# EAGLE board remote_v0.14-Beta.c2a04ac5 (EAGLE 7.7.0), part 1 of 2
BOARDNAME: BERTL-06-1; REVISION: R1.0; VERSION: V1.0
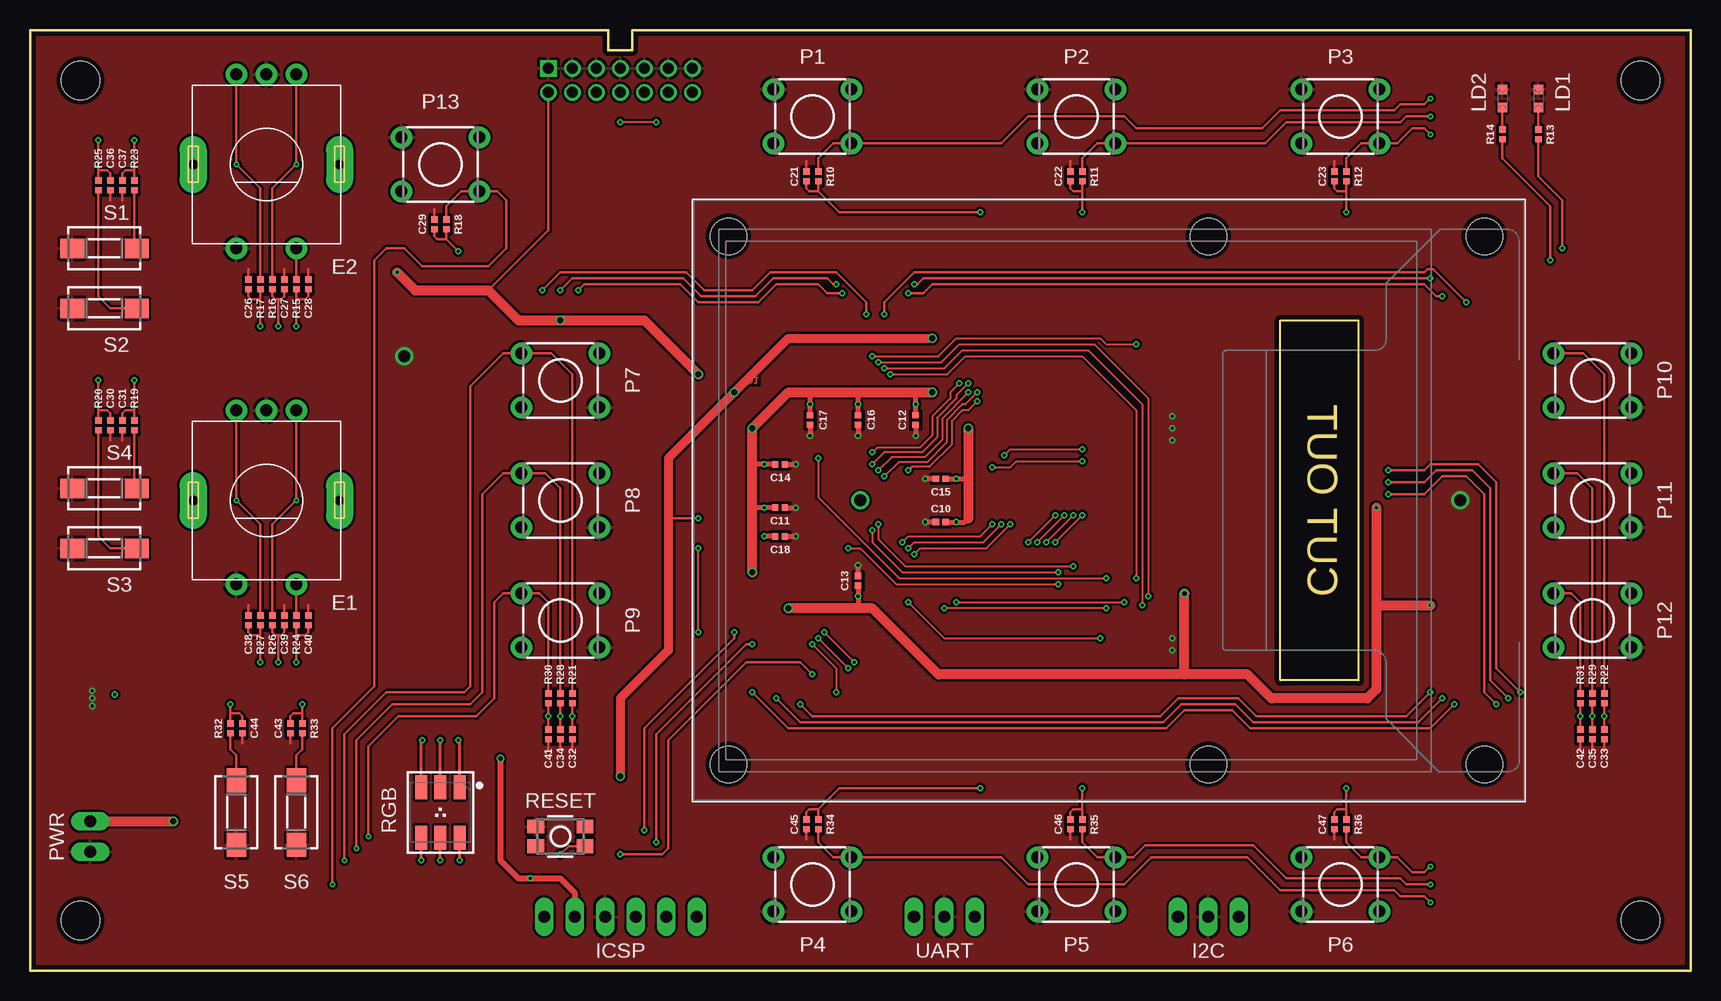
[diagram p0: board, top side]
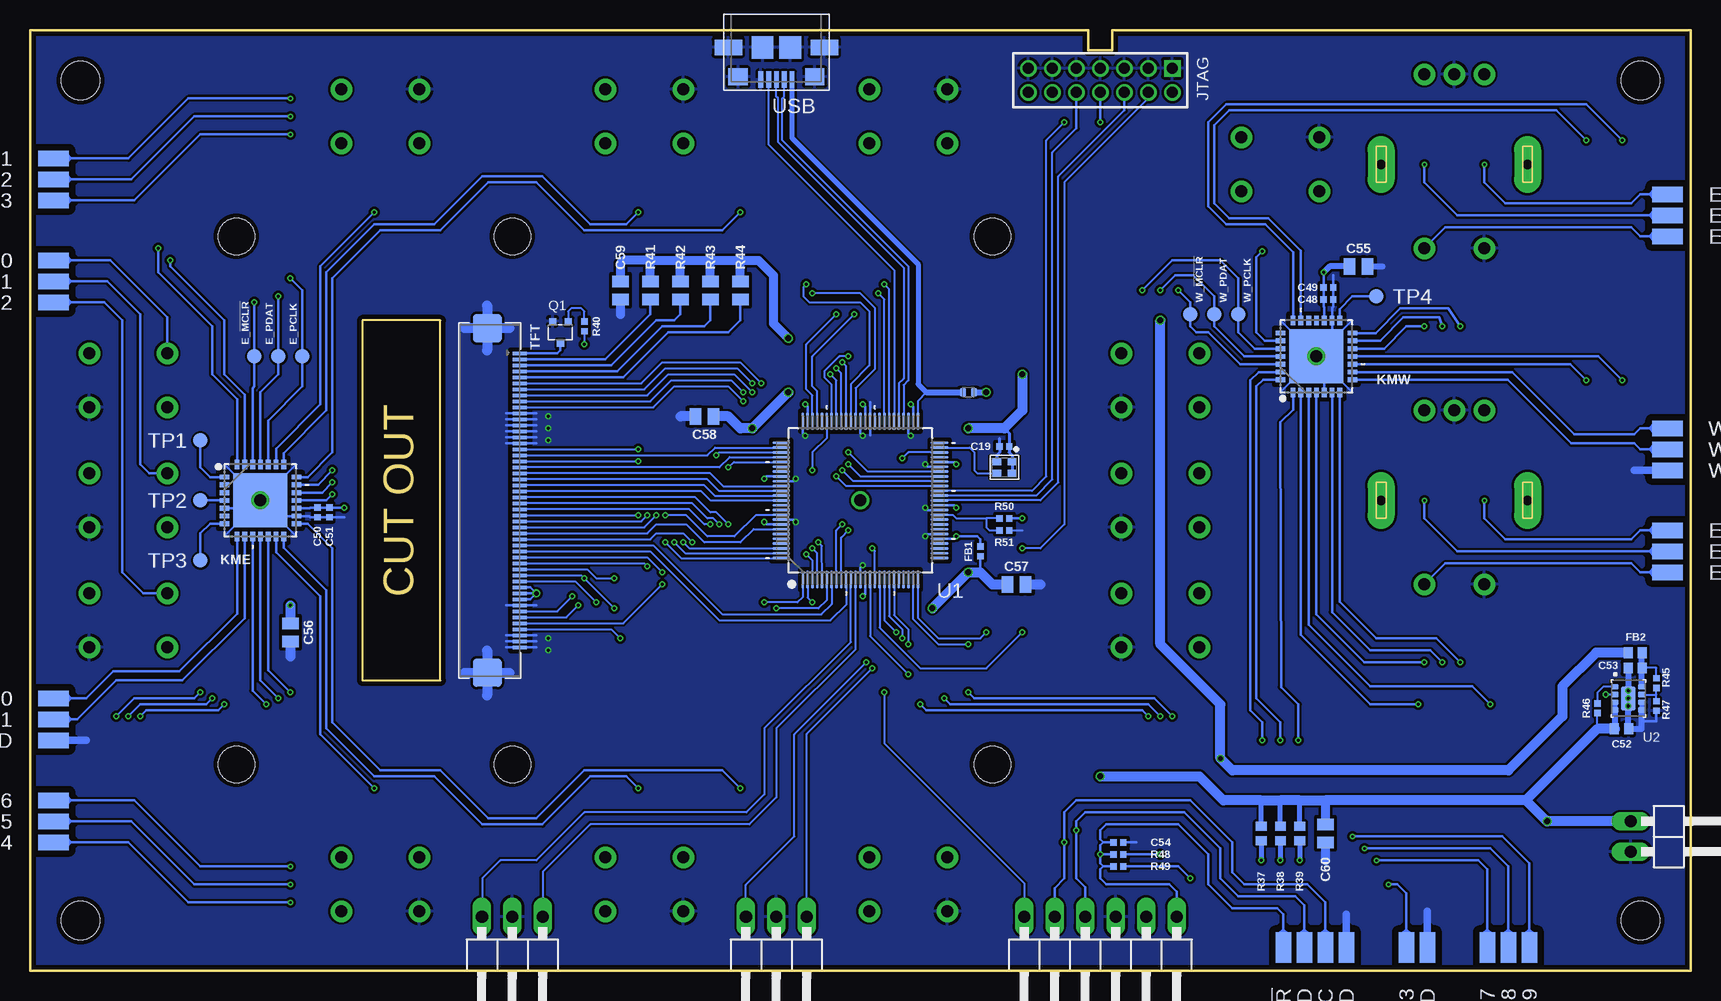
[diagram p1: board, bottom side, seen from below]

Size 138.4 x 78.4 mm. Coordinates in mm from the lower left corner, seen from the top.
Outline: 0,78.4 48.2,78.4 48.2,76.7 50.2,76.7 50.2,78.4 138.4,78.4 138.4,0 0,0 0,78.4
Outline: 104.2,54.2 110.7,54.2 110.7,24.2 104.2,24.2 104.2,54.2
Copper layers (1*16): Top 0.0356mm / dielectric 1.5011mm / Bottom 0.0356mm
Design rules "OSHPark-2layer-new *": minimum track width 6mil, minimum drill 10mil, track to track 6mil, track to pad 6mil, pad to pad 6mil, via to via 6mil, smd to smd 6mil, copper to edge 15mil, drill to drill 6mil, minimum pad ring 5mil, minimum via ring 5mil, stop-mask expansion 2mil, vias tented up to drill 50mil, thermal gap 10mil
Net classes: 0 default: width 0.152 mm, drill 0.254 mm, clearance 0.152 mm
Holes 3.2 mm at 4.2,74.2 4.2,4.2 134.2,4.2 134.2,74.2
Holes 3 mm at 121.2,61.2 58.2,61.2 58.2,17.2 121.2,17.2 98.2,61.2 98.2,17.2
tKeepout: area 55.7,58.7 to 60.7,63.7; area 95.7,58.7 to 100.7,63.7; area 118.7,58.7 to 123.7,63.7; area 118.7,14.7 to 123.7,19.7; area 95.7,14.7 to 100.7,19.7; area 55.7,14.7 to 60.7,19.7; area 130.2,0.2 to 138.2,8.2; area 130.2,70.2 to 138.2,78.2; area 0.2,70.2 to 8.2,78.2; area 0.2,0.2 to 8.2,8.2
bKeepout: area 54.2,57.2 to 62.2,65.2; area 94.2,57.2 to 102.2,65.2; area 117.2,57.2 to 125.2,65.2; area 117.2,13.2 to 125.2,21.2; area 94.2,13.2 to 102.2,21.2; area 54.2,13.2 to 62.2,21.2; area 0.2,70.2 to 8.2,78.2; area 0.2,0.2 to 8.2,8.2; area 130.2,0.2 to 138.2,8.2; area 130.2,70.2 to 138.2,78.2

## Footprints (pad centres in the part's own frame; a part is rotated, then mirrored left to right if it is on the bottom)
50X100-MIL = smd 1.27 x 2.54: 1 0,0
0402-C = smd 0.52 x 0.52: 1 -0.4,0; 2 0.4,0
0603-C = smd 0.75 x 0.9: 1 -0.6,0; 2 0.6,0
0805-C = smd 0.95 x 1.35: 1 -0.75,0; 2 0.75,0
DFN1006D-2 = smd 0.5 x 0.7: A 0.45,0; C -0.45,0
EC11_SW-LP = drill 1 pad 1.778: A -2.5,-7.5; B 2.5,-7.5; C 0,-7.5; D -2.5,7; E 2.5,7 | drill 0.8 pad 2.25 long: GND1 -6.1,0; GND2 6.1,0
TP12R = smd 1.2 x 1.2: TP 0,0
1X03/90 = drill 1.016 long: 1 -2.54,-3.81; 2 0,-3.81; 3 2.54,-3.81
1X06/90 = drill 1.016 long: 1 -6.35,-3.81; 2 -3.81,-3.81; 3 -1.27,-3.81; 4 1.27,-3.81; 5 3.81,-3.81; 6 6.35,-3.81
2X07M = drill 0.914 square: 1 -6,-1 | drill 0.914: 2 -6,1; 3 -4,-1; 4 -4,1; 5 -2,-1; 6 -2,1; 7 0,-1; 8 0,1; 9 2,-1; 10 2,1; 11 4,-1; 12 4,1; 13 6,-1; 14 6,1
QFN65P600X600X100-29N = smd 0.8 x 0.4: 1 -3,1.95; 2 -3,1.3; 3 -3,0.65; 4 -3,0; 5 -3,-0.65; 6 -3,-1.3; 7 -3,-1.95; 15 3,-1.95; 16 3,-1.3; 17 3,-0.65; 18 3,0; 19 3,0.65; 20 3,1.3; 21 3,1.95 | smd 0.4 x 0.8: 8 -1.95,-3; 9 -1.3,-3; 10 -0.65,-3; 11 0,-3; 12 0.65,-3; 13 1.3,-3; 14 1.95,-3; 22 1.95,3; 23 1.3,3; 24 0.65,3; 25 0,3; 26 -0.65,3; 27 -1.3,3; 28 -1.95,3 | smd 4.5 x 4.5: EP 0,0
CHIPLED_0603 = smd 0.8 x 0.8: A 0,-0.75; C 0,0.75
6X6-THT = drill 1 pad 1.778: 1 -3.25,2.25; 2 3.25,2.25; 3 -3.25,-2.25; 4 3.25,-2.25
1X02/90 = drill 1.016 long: 1 -2.54,-3.81; 2 0,-3.81
SOT323 = smd 0.6 x 0.55: 1 -0.65,-0.925; 2 0.65,-0.925; 3 0,0.925
3X4MM = smd 1.4 x 1.15: 1 -2.05,0.825; 2 2.05,0.825; 3 -2.05,-0.825; 4 2.05,-0.825
RGBLED_PLCC6 = smd 1 x 2: 1 -1.6,-2.108; 2 0,-2.108; 3 1.6,-2.108; 4 1.6,2.108; 5 0,2.108; 6 -1.6,2.108
DTSM-3 = smd 2 x 1.6: 1 -2.7,0; 2 2.7,0
TFT_2.83IN_240X320_50PIN = smd 0.275 x 1.2 bottom: 1 12.25,-10.39; 2 11.75,-10.39; 3 11.25,-10.39; 4 10.75,-10.39; 5 10.25,-10.39; 6 9.75,-10.39; 7 9.25,-10.39; 8 8.75,-10.39; 9 8.25,-10.39; 10 7.75,-10.39; 11 7.25,-10.39; 12 6.75,-10.39; 13 6.25,-10.39; 14 5.75,-10.39; 15 5.25,-10.39; 16 4.75,-10.39; 17 4.25,-10.39; 18 3.75,-10.39; 19 3.25,-10.39; 20 2.75,-10.39; 21 2.25,-10.39; 22 1.75,-10.39; 23 1.25,-10.39; 24 0.75,-10.39; 25 0.25,-10.39; 26 -0.25,-10.39; 27 -0.75,-10.39; 28 -1.25,-10.39; 29 -1.75,-10.39; 30 -2.25,-10.39; 31 -2.75,-10.39; 32 -3.25,-10.39; 33 -3.75,-10.39; 34 -4.25,-10.39; 35 -4.75,-10.39; 36 -5.25,-10.39; 37 -5.75,-10.39; 38 -6.25,-10.39; 39 -6.75,-10.39; 40 -7.25,-10.39; 41 -7.75,-10.39; 42 -8.25,-10.39; 43 -8.75,-10.39; 44 -9.25,-10.39; 45 -9.75,-10.39; 46 -10.25,-10.39; 47 -10.75,-10.39; 48 -11.25,-10.39; 49 -11.75,-10.39; 50 -12.25,-10.39 | smd 2.4 x 2.4 bottom: PAD1 14.35,-13.09; PAD2 -14.35,-13.09
QFP40P1200X1200X120-100N = smd 1.473 x 0.229: 1 -6.6,4.8; 2 -6.6,4.4; 3 -6.6,4; 4 -6.6,3.6; 5 -6.6,3.2; 6 -6.6,2.8; 7 -6.6,2.4; 8 -6.6,2; 9 -6.6,1.6; 10 -6.6,1.2; 11 -6.6,0.8; 12 -6.6,0.4; 13 -6.6,0; 14 -6.6,-0.4; 15 -6.6,-0.8; 16 -6.6,-1.2; 17 -6.6,-1.6; 18 -6.6,-2; 19 -6.6,-2.4; 20 -6.6,-2.8; 21 -6.6,-3.2; 22 -6.6,-3.6; 23 -6.6,-4; 24 -6.6,-4.4; 25 -6.6,-4.8; 51 6.6,-4.8; 52 6.6,-4.4; 53 6.6,-4; 54 6.6,-3.6; 55 6.6,-3.2; 56 6.6,-2.8; 57 6.6,-2.4; 58 6.6,-2; 59 6.6,-1.6; 60 6.6,-1.2; 61 6.6,-0.8; 62 6.6,-0.4; 63 6.6,0; 64 6.6,0.4; 65 6.6,0.8; 66 6.6,1.2; 67 6.6,1.6; 68 6.6,2; 69 6.6,2.4; 70 6.6,2.8; 71 6.6,3.2; 72 6.6,3.6; 73 6.6,4; 74 6.6,4.4; 75 6.6,4.8 | smd 0.229 x 1.473: 26 -4.8,-6.6; 27 -4.4,-6.6; 28 -4,-6.6; 29 -3.6,-6.6; 30 -3.2,-6.6; 31 -2.8,-6.6; 32 -2.4,-6.6; 33 -2,-6.6; 34 -1.6,-6.6; 35 -1.2,-6.6; 36 -0.8,-6.6; 37 -0.4,-6.6; 38 0,-6.6; 39 0.4,-6.6; 40 0.8,-6.6; 41 1.2,-6.6; 42 1.6,-6.6; 43 2,-6.6; 44 2.4,-6.6; 45 2.8,-6.6; 46 3.2,-6.6; 47 3.6,-6.6; 48 4,-6.6; 49 4.4,-6.6; 50 4.8,-6.6; 76 4.8,6.6; 77 4.4,6.6; 78 4,6.6; 79 3.6,6.6; 80 3.2,6.6; 81 2.8,6.6; 82 2.4,6.6; 83 2,6.6; 84 1.6,6.6; 85 1.2,6.6; 86 0.8,6.6; 87 0.4,6.6; 88 0,6.6; 89 -0.4,6.6; 90 -0.8,6.6; 91 -1.2,6.6; 92 -1.6,6.6; 93 -2,6.6; 94 -2.4,6.6; 95 -2.8,6.6; 96 -3.2,6.6; 97 -3.6,6.6; 98 -4,6.6; 99 -4.4,6.6; 100 -4.8,6.6
MICROSIP = smd 0.48 x 0.58: 1 -0.975,-1.1; 2 -0.325,-1.1; 3 0.325,-1.1; 4 0.975,-1.1; 5 0.975,1.1; 6 0.325,1.1; 7 -0.325,1.1; 8 -0.975,1.1 | smd 2 x 1.2: EP 0,0
2.0X1.6 = smd 0.75 x 0.65: 1 -0.65,-0.5; 2 0.65,-0.5; 3 0.65,0.5; 4 -0.65,0.5
MICRO-AB-H-SMT = smd 0.4 x 1.35: 1 -1.3,4.125; 2 -0.65,4.125; 3 0,4.125; 4 0.65,4.125; 5 1.3,4.125 | smd 2.3 x 1.3: Z1 -4,1.45; Z4 4,1.45 | smd 1.8 x 1.9: Z2 -1.15,1.45; Z3 1.15,1.45 | smd 1.6 x 1.4: Z5 -3.2,3.9; Z6 3.2,3.9

## Placement (x,y rotation side)
!MCLR  [50X100-MIL]  33.95,1.95 180 bottom
B_GND  [50X100-MIL]  21.95,1.95 180 bottom
B_P1  [50X100-MIL]  136.45,67.7 90 bottom
B_P2  [50X100-MIL]  136.45,65.95 90 bottom
B_P3  [50X100-MIL]  136.45,64.2 90 bottom
B_P4  [50X100-MIL]  136.45,10.7 90 bottom
B_P5  [50X100-MIL]  136.45,12.45 90 bottom
B_P6  [50X100-MIL]  136.45,14.2 90 bottom
B_P7  [50X100-MIL]  16.95,1.95 180 bottom
B_P8  [50X100-MIL]  15.2,1.95 180 bottom
B_P9  [50X100-MIL]  13.45,1.95 180 bottom
B_P10  [50X100-MIL]  136.45,59.2 90 bottom
B_P11  [50X100-MIL]  136.45,57.45 90 bottom
B_P12  [50X100-MIL]  136.45,55.7 90 bottom
B_P13  [50X100-MIL]  23.7,1.95 180 bottom
C10  100n  [0402-C]  75.9,37.4 180 top
C11  100n  [0402-C]  62.5,38.6 0 top
C12  100n  [0402-C]  73.8,45.9 270 top
C13  100n  [0402-C]  69,32.5 90 top
C14  100n  [0402-C]  62.5,42.2 0 top
C15  100n  [0402-C]  75.9,41 180 top
C16  100n  [0402-C]  69,45.9 270 top
C17  100n  [0402-C]  65,45.9 270 top
C18  100n  [0402-C]  62.5,36.2 0 top
C19  1u  [0402-C]  57.2,43.7 180 bottom
C21  [0402-C]  64.7,66.2 90 top
C22  [0402-C]  86.7,66.2 90 top
C23  [0402-C]  108.7,66.2 90 top
C26  [0402-C]  18.2,57.2 90 top
C27  [0402-C]  21.2,57.2 90 top
C28  [0402-C]  23.2,57.2 90 top
C29  [0402-C]  33.7,62.2 90 top
C30  [0402-C]  6.7,45.45 270 top
C31  [0402-C]  7.7,45.45 270 top
C32  [0402-C]  45.2,19.7 90 top
C33  [0402-C]  131.2,19.7 90 top
C34  [0402-C]  44.2,19.7 90 top
C35  [0402-C]  130.2,19.7 90 top
C36  [0402-C]  6.7,65.45 270 top
C37  [0402-C]  7.7,65.45 270 top
C38  [0402-C]  18.2,29.2 90 top
C39  [0402-C]  21.2,29.2 90 top
C40  [0402-C]  23.2,29.2 90 top
C41  [0402-C]  43.2,19.7 90 top
C42  [0402-C]  129.2,19.7 90 top
C43  [0402-C]  21.7,20.2 270 top
C44  [0402-C]  17.7,20.2 270 top
C45  [0402-C]  64.7,12.2 90 top
C46  [0402-C]  86.7,12.2 90 top
C47  [0402-C]  108.7,12.2 90 top
C48  100n  [0402-C]  30.2,55.95 0 bottom
C49  1u  [0402-C]  30.2,56.95 0 bottom
C50  100n  [0402-C]  114.45,38.2 270 bottom
C51  1u  [0402-C]  113.45,38.2 270 bottom
C52  10u  [0603-C]  5.77,20.16 0 bottom
C53  10u  [0603-C]  4.63,25.24 180 bottom
C54  100n  [0402-C]  47.7,10.7 0 bottom
C55  22u  [0805-C]  27.7,58.7 0 bottom
C56  22u  [0805-C]  116.7,28.2 270 bottom
C57  22u  [0805-C]  56.2,32.2 0 bottom
C58  22u  [0805-C]  82.2,46.2 180 bottom
C59  22u  [0805-C]  89.2,56.7 270 bottom
C60  22u  [0805-C]  30.45,11.45 270 bottom
C_GND  [50X100-MIL]  28.7,1.95 180 bottom
D1  PMEG2010BELD  [DFN1006D-2]  60.2,48.2 180 bottom
E1  EC11_SW-LP  [EC11_SW-LP]  19.7,39.2 180 top
E1_A  [50X100-MIL]  1.95,34.95 270 bottom
E1_B  [50X100-MIL]  1.95,36.7 270 bottom
E1_S  [50X100-MIL]  1.95,33.2 270 bottom
E2  EC11_SW-LP  [EC11_SW-LP]  19.7,67.2 180 top
E2_A  [50X100-MIL]  1.95,62.95 270 bottom
E2_B  [50X100-MIL]  1.95,64.7 270 bottom
E2_S  [50X100-MIL]  1.95,61.2 270 bottom
E_!MCLR  TPTP12R  [TP12R]  119.7,51.2 270 bottom
E_GND  [50X100-MIL]  136.45,19.2 90 bottom
E_PCLK  TPTP12R  [TP12R]  115.7,51.2 270 bottom
E_PDAT  TPTP12R  [TP12R]  117.7,51.2 270 bottom
E_RC0  [50X100-MIL]  136.45,22.7 90 bottom
E_RC1  [50X100-MIL]  136.45,20.95 90 bottom
FB1  600R  [0402-C]  59.2,34.95 90 bottom
FB2  33R  [0603-C]  4.63,26.51 180 bottom
I2C  [1X03/90]  98.2,0.7 180 bottom
ICSP  [1X06/90]  49.2,0.7 180 bottom
JTAG  [2X07M]  49.2,74.2 180 bottom
KME  PIC16F1718-I/ML  [QFN65P600X600X100-29N]  119.2,39.2 0 bottom
KMW  PIC16F1718-I/ML  [QFN65P600X600X100-29N]  31.2,51.2 90 bottom
LD1  LED  [CHIPLED_0603]  125.7,72.7 0 top
LD2  LED  [CHIPLED_0603]  122.7,72.7 0 top
P1  DTSM-6THT  [6X6-THT]  65.2,71.2 0 top
P2  DTSM-6THT  [6X6-THT]  87.2,71.2 0 top
P3  DTSM-6THT  [6X6-THT]  109.2,71.2 0 top
P4  DTSM-6THT  [6X6-THT]  65.2,7.2 0 top
P5  DTSM-6THT  [6X6-THT]  87.2,7.2 0 top
P6  DTSM-6THT  [6X6-THT]  109.2,7.2 0 top
P7  DTSM-6THT  [6X6-THT]  44.2,49.2 0 top
P8  DTSM-6THT  [6X6-THT]  44.2,39.2 0 top
P9  DTSM-6THT  [6X6-THT]  44.2,29.2 0 top
P10  DTSM-6THT  [6X6-THT]  130.2,49.2 0 top
P11  DTSM-6THT  [6X6-THT]  130.2,39.2 0 top
P12  DTSM-6THT  [6X6-THT]  130.2,29.2 0 top
P13  DTSM-6THT  [6X6-THT]  34.2,67.2 0 top
PGEC  [50X100-MIL]  30.45,1.95 180 bottom
PGED  [50X100-MIL]  32.2,1.95 180 bottom
PWR  [1X02/90]  1.2,9.91 270 bottom
Q1  MMBT2222  [SOT323]  94.2,53.2 180 bottom
R10  [0402-C]  65.7,66.2 90 top
R11  [0402-C]  87.7,66.2 90 top
R12  [0402-C]  109.7,66.2 90 top
R13  [0402-C]  125.7,69.7 90 top
R14  [0402-C]  122.7,69.7 90 top
R15  [0402-C]  22.2,57.2 270 top
R16  [0402-C]  20.2,57.2 90 top
R17  [0402-C]  19.2,57.2 90 top
R18  [0402-C]  34.7,62.2 270 top
R19  [0402-C]  8.7,45.45 270 top
R20  [0402-C]  5.7,45.45 270 top
R21  [0402-C]  45.2,22.7 90 top
R22  [0402-C]  131.2,22.7 90 top
R23  [0402-C]  8.7,65.45 270 top
R24  [0402-C]  22.2,29.2 270 top
R25  [0402-C]  5.7,65.45 270 top
R26  [0402-C]  20.2,29.2 90 top
R27  [0402-C]  19.2,29.2 90 top
R28  [0402-C]  44.2,22.7 90 top
R29  [0402-C]  130.2,22.7 90 top
R30  [0402-C]  43.2,22.7 90 top
R31  [0402-C]  129.2,22.7 90 top
R32  [0402-C]  16.7,20.2 270 top
R33  [0402-C]  22.7,20.2 270 top
R34  [0402-C]  65.7,12.2 90 top
R35  [0402-C]  87.7,12.2 90 top
R36  [0402-C]  109.7,12.2 90 top
R37  [0603-C]  35.8,11.45 270 bottom
R38  [0603-C]  34.2,11.45 270 bottom
R39  [0603-C]  32.6,11.45 270 bottom
R40  2k  [0402-C]  92.2,53.7 270 bottom
R41  68R  [0805-C]  86.7,56.7 270 bottom
R42  68R  [0805-C]  84.2,56.7 270 bottom
R43  68R  [0805-C]  81.7,56.7 270 bottom
R44  68R  [0805-C]  79.2,56.7 270 bottom
R45  510k  [0402-C]  2.86,23.98 90 bottom
R46  10k  [0402-C]  7.78,21.88 270 bottom
R47  162k  [0402-C]  2.86,22.07 90 bottom
R48  1k  [0402-C]  47.7,9.7 180 bottom
R49  10k  [0402-C]  47.7,8.7 0 bottom
R50  10k  [0402-C]  57.2,37.7 0 bottom
R51  10k  [0402-C]  57.2,36.7 180 bottom
RESET  DTSM-6  [3X4MM]  44.2,11.2 0 top
RGB  [RGBLED_PLCC6]  34.2,13.2 180 top
S1  DTSM-3  [DTSM-3]  6.2,60.2 0 top
S2  DTSM-3  [DTSM-3]  6.2,55.2 0 top
S3  DTSM-3  [DTSM-3]  6.2,40.2 0 top
S4  DTSM-3  [DTSM-3]  6.2,35.2 0 top
S5  DTSM-3  [DTSM-3]  17.2,13.2 90 top
S6  DTSM-3  [DTSM-3]  22.2,13.2 90 top
TFT  [TFT_2.83IN_240X320_50PIN]  87.2,39.2 90 top
TP1  TPTP12R  [TP12R]  124.2,44.2 0 bottom
TP2  TPTP12R  [TP12R]  124.2,39.2 0 bottom
TP3  TPTP12R  [TP12R]  124.2,34.2 0 bottom
TP4  TPTP12R  [TP12R]  26.2,56.2 0 bottom
U1  PIC32MZ-100  [QFP40P1200X1200X120-100N]  69.2,39.2 90 bottom
U2  TPS82085  [MICROSIP]  5.2,22.7 270 bottom
U3  SMD-OSC-2.0X1.6  [2.0X1.6]  57.2,41.95 180 bottom
UART  [1X03/90]  76.2,0.7 180 bottom
USB  5_USB_3S  [MICRO-AB-H-SMT]  76.2,78.4 180 bottom
W_!MCLR  TPTP12R  [TP12R]  41.7,54.7 270 bottom
W_GND  [50X100-MIL]  1.95,41.7 270 bottom
W_PCLK  TPTP12R  [TP12R]  37.7,54.7 270 bottom
W_PDAT  TPTP12R  [TP12R]  39.7,54.7 270 bottom
W_RC0  [50X100-MIL]  1.95,43.45 270 bottom
W_RC1  [50X100-MIL]  1.95,45.2 270 bottom

## Library data of the parts
!MCLR B_GND B_P1-B_P13 C_GND E1_A E1_B E1_S E2_A E2_B E2_S E_GND E_RC0 E_RC1 PGEC PGED W_GND W_RC0 W_RC1 = smd_pads
C10-C19 C21-C23 C26-C60 FB1 FB2 R10-R51 = generic-rcl
D1 = pmeg2010beld
E1 E2 = encoder
E_!MCLR E_PCLK E_PDAT TP1-TP4 W_!MCLR W_PCLK W_PDAT = testpad
I2C JTAG PWR UART = pinhead-2
ICSP = pinhead
KME KMW = pic16f1718
LD1 LD2 = led
P1-P13 RESET S1-S6 = switch
Q1 = transistor
RGB = rgb_led
TFT = tft
U1 = pic32mz
U2 = TPS82085
U3 = xtal
USB = usb

## Nets
3V3: C10.1 C11.1 C12.1 C13.1 C14.1 C15.1 C16.1 C17.1 C19.1 C48.1 C49.1 C50.1 C51.1 C55.1 C56.1 C57.1 C58.1 FB1.1 FB2.2 ICSP.2 JTAG.2 KME.17 KMW.17 R49.2 TFT.40 TFT.41 TFT.42 U1.14 U1.37 U1.46 U1.52 U1.62 U1.74 U1.83 U1.93 U3.1 U3.4
5V0: C52.1 C59.1 C60.1 D1.C PWR.1 R37.1 R38.1 R39.1 R41.1 R42.1 R43.1 R44.1 R46.2 R50.2 U2.3 U2.4
!MCLR: !MCLR.1 C54.1 ICSP.1 R48.2 R49.1 U1.15
!SS6: TFT.38 U1.6 U1.68
AN6: R50.1 R51.2 U1.35
AVDD: C18.1 FB1.2 U1.30
B: KMW.27 RGB.1
B14_L12_P: U2.2
D+: U1.55 USB.3
D-: U1.54 USB.2
E1_A: C39.1 KMW.6 R26.1
E1_B: C38.1 KMW.7 R27.1
E1_S: C40.1 KMW.4 R24.2
E2_A: C27.1 KMW.13 R16.1
E2_B: C26.1 KMW.14 R17.1
E2_S: C28.1 KMW.12 R15.2
EN_B: R46.1 U2.1
FB_B: R45.1 R47.2 U2.7
G: KMW.28 RGB.2
GND: B_GND.1 C10.2 C11.2 C12.2 C13.2 C14.2 C15.2 C16.2 C17.2 C18.2 C19.2 C21.2 C22.2 C23.2 C26.2 C27.2 C28.2 C29.2 C30.2 C31.2 C32.1 C33.1 C34.1 C35.1 C36.2 C37.2 C38.2 C39.2 C40.2 C41.1 C42.1 C43.2 C44.2 C45.1 C46.1 C47.1 C48.2 C49.2 C50.2 C51.2 C52.2 C53.2 C54.2 C55.2 C56.2 C57.2 C58.2 C59.2 C60.2 C_GND.1 E1.C E1.E E2.C E2.E E_GND.1 I2C.2 ICSP.3 JTAG.1 JTAG.3 JTAG.5 JTAG.7 JTAG.9 JTAG.11 JTAG.13 KME.5 KME.16 KME.EP KMW.5 KMW.16 KMW.EP LD1.C LD2.C P1.1 P2.1 P3.1 P4.3 P5.3 P6.3 P7.4 P8.4 P9.4 P10.4 P11.4 P12.4 P13.1 PWR.2 Q1.2 R47.1 R51.1 RESET.1 S1.1 S2.1 S3.1 S4.1 S5.1 S6.1 TFT.11 TFT.12 TFT.13 TFT.14 TFT.15 TFT.16 TFT.43 TFT.48 TFT.49 TFT.50 U1.13 U1.31 U1.36 U1.45 U1.53 U1.61 U1.63 U1.75 U1.84 U1.92 U2.5 U2.6 U2.EP U3.2 UART.2 USB.5 USB.Z1 USB.Z2 USB.Z3 USB.Z4 USB.Z5 USB.Z6 W_GND.1
KME_!MCLR: E_!MCLR.TP KME.26 U1.73
KME_PCLK: E_PCLK.TP KME.24 U1.65
KME_PDAT: E_PDAT.TP KME.25 U1.64
KMW_!MCLR: KMW.26 U1.72 W_!MCLR.TP
KMW_PCLK: KMW.24 U1.58 W_PCLK.TP
KMW_PDAT: KMW.25 U1.57 W_PDAT.TP
LED_A1: R41.2 TFT.2
LED_A2: R42.2 TFT.3
LED_A3: R43.2 TFT.4
LED_A4: R44.2 TFT.5
LED_CK: Q1.3 TFT.1
N$2: E2.A E2_A.1 R16.2
N$3: B_P1.1 P1.4 R10.2
N$5: E2.B E2_B.1 R17.2
N$6: B_P2.1 P2.4 R11.2
N$7: B_P3.1 P3.4 R12.2
N$8: E2.D E2_S.1 R15.1
N$10: R19.2 S3.2
N$11: R20.2 S4.2
N$13: R23.2 S1.2
N$14: R25.2 S2.2
N$15: LD1.A R13.2
N$16: LD2.A R14.2
N$17: E1.A E1_A.1 R26.2
N$18: E1.B E1_B.1 R27.2
N$19: E1.D E1_S.1 R24.1
N$20: R32.2 S5.2
N$21: R33.2 S6.2
N$22: B_P4.1 P4.2 R34.1
N$23: B_P5.1 P5.2 R35.1
N$24: B_P6.1 P6.2 R36.1
N$25: B_P9.1 P9.1 R30.2
N$26: B_P12.1 P12.1 R31.2
N$27: B_P8.1 P8.1 R28.2
N$28: B_P11.1 P11.1 R29.2
N$29: B_P7.1 P7.1 R21.2
N$30: B_P10.1 P10.1 R22.2
N$33: KMW.9 W_RC1.1
N$34: R39.2 RGB.4
N$35: R38.2 RGB.5
N$37: KME.1 TP1.TP
N$38: KME.7 TP3.TP
N$39: KME.4 TP2.TP
N$41: R37.2 RGB.6
N$43: B_P13.1 P13.4 R18.1
N$44: KMW.15 TP4.TP
N$45: R48.1 RESET.4
N$46: Q1.1 R40.1
N$47: E_RC0.1 KME.8
N$48: E_RC1.1 KME.9
N$49: KMW.8 W_RC0.1
OEN: U1.50
OSC1: U1.49 U3.3
P1: C21.1 KME.21 R10.1
P2: C22.1 KME.22 R11.1
P3: C23.1 KME.23 R12.1
P4: C45.2 KME.15 R34.2
P5: C46.2 KME.14 R35.2
P6: C47.2 KME.13 R36.2
P7: C32.2 KME.12 R21.1
P8: C34.2 KME.11 R28.1
P9: C41.2 KME.10 R30.1
P10: C33.2 KME.20 R22.1
P11: C35.2 KME.19 R29.1
P12: C42.2 KME.18 R31.1
P13: C29.1 KMW.23 R18.2
PGEC1: ICSP.5 PGEC.1 U1.24
PGED1: ICSP.4 PGED.1 U1.25
PMD0: TFT.32 U1.91
PMD1: TFT.31 U1.94
PMD2: TFT.30 U1.98
PMD3: TFT.29 U1.99
PMD4: TFT.28 U1.100
PMD5: TFT.27 U1.3
PMD6: TFT.26 U1.4
PMD7: TFT.25 U1.5
PMD8: TFT.24 U1.88
PMD9: TFT.23 U1.87
PMD10: TFT.22 U1.86
PMD11: TFT.21 U1.85
PMD12: TFT.20 U1.79
PMD13: TFT.19 U1.80
PMD14: TFT.18 U1.77
PMD15: TFT.17 U1.78
PMRD: TFT.35 U1.9
PMWR: TFT.36 U1.8
R: KMW.1 RGB.3
RA5: TFT.47 U1.2
RA6: U1.89
RA7: U1.90
RA9: U1.28
RA10: U1.29
RB4: U1.21
RB12: TFT.9 U1.41
RB13: TFT.8 U1.42
RD1: U1.76
RG12: U1.96
RG13: U1.97
RG14: U1.95
RG15: TFT.39 U1.1
RPB2/4RX/6RX/SS2/SDI6: U1.23
RPB3/3RX/SDI2/SDI4: U1.22
RPB5: ICSP.6 U1.20
RPB6/4RX/6RX/SS2/SDI6: U1.26
RPB7/2RX/SS1/SS3-SS5: U1.27
RPB8/2RX/SS1/SS3-SS5: U1.32
RPB9/1RX/5RX/SDI1/SDI3/SDI5/SS6: U1.33
RPB10/1RX/5RX/SDI1/SDI3/SDI5/SS6: U1.34
RPB14: TFT.7 U1.43
RPB15: TFT.6 U1.44
RPD0: U1.71
RPD4: U1.81
RPD5: U1.82
RPD10: R40.2 U1.69
RPD11: TFT.10 U1.70
RPD15: U1.47
RPE8: U1.18 UART.3
RPE9: U1.19 UART.1
RPG9: TFT.46 U1.16
S1_A: C44.1 KMW.3 R32.1
S1_B: C43.1 KMW.2 R33.1
S2_A: KME.28 R13.1
S2_B: KME.27 R14.1
SCK6: TFT.37 U1.48
SCL1: TFT.44 U1.66
SCL2: U1.59
SCL4: I2C.1 U1.12
SDA1: TFT.45 U1.67
SDA2: U1.60
SDA4: I2C.3 U1.11
SDI6: TFT.33 U1.7
SDO6: TFT.34 U1.10
TCK: JTAG.6 U1.38
TDI: JTAG.10 U1.39
TDO: JTAG.8 U1.40
TMS: JTAG.4 U1.17
TS1_A: C37.1 KMW.20 R23.1
TS1_B: C36.1 KMW.21 R25.1
TS2_A: C31.1 KMW.10 R19.1
TS2_B: C30.1 KMW.11 R20.1
USBID: U1.56 USB.4
VBUS: D1.A U1.51 USB.1
VOUT_B: C53.1 FB2.1 R45.2 U2.8